# Altium PCB 高低音调节.PcbDoc
Units mil, origin at the board's own origin, x right, y up, seen from the top; angles counter-clockwise.
Board outline 11440 x 5375 mil, 2 copper layers (Top Layer, Bottom Layer); 43 components, 28 nets, 102 pads, 0 vias.
Unrouted connection lines stored in the file: 3.
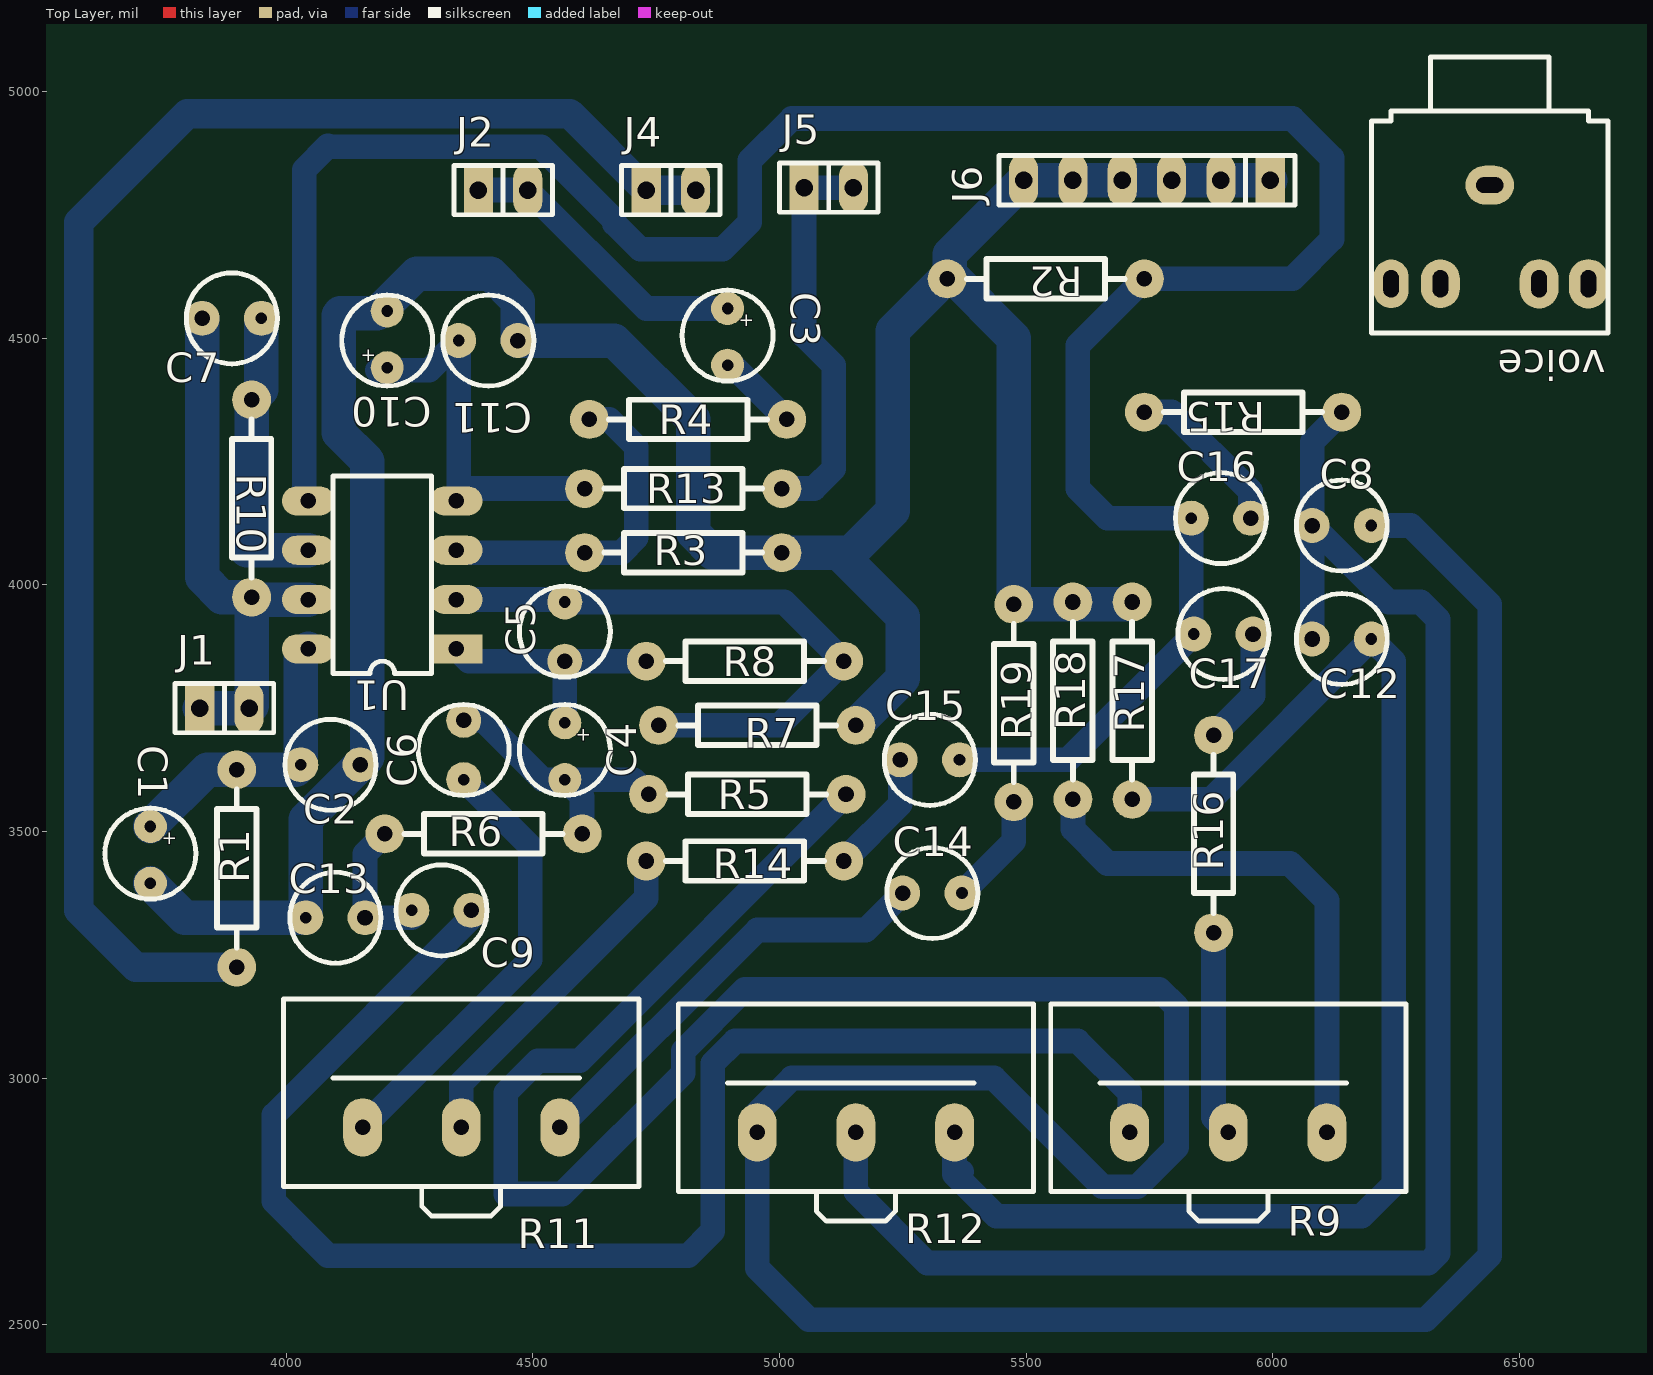
[diagram p0: Top Layer view]
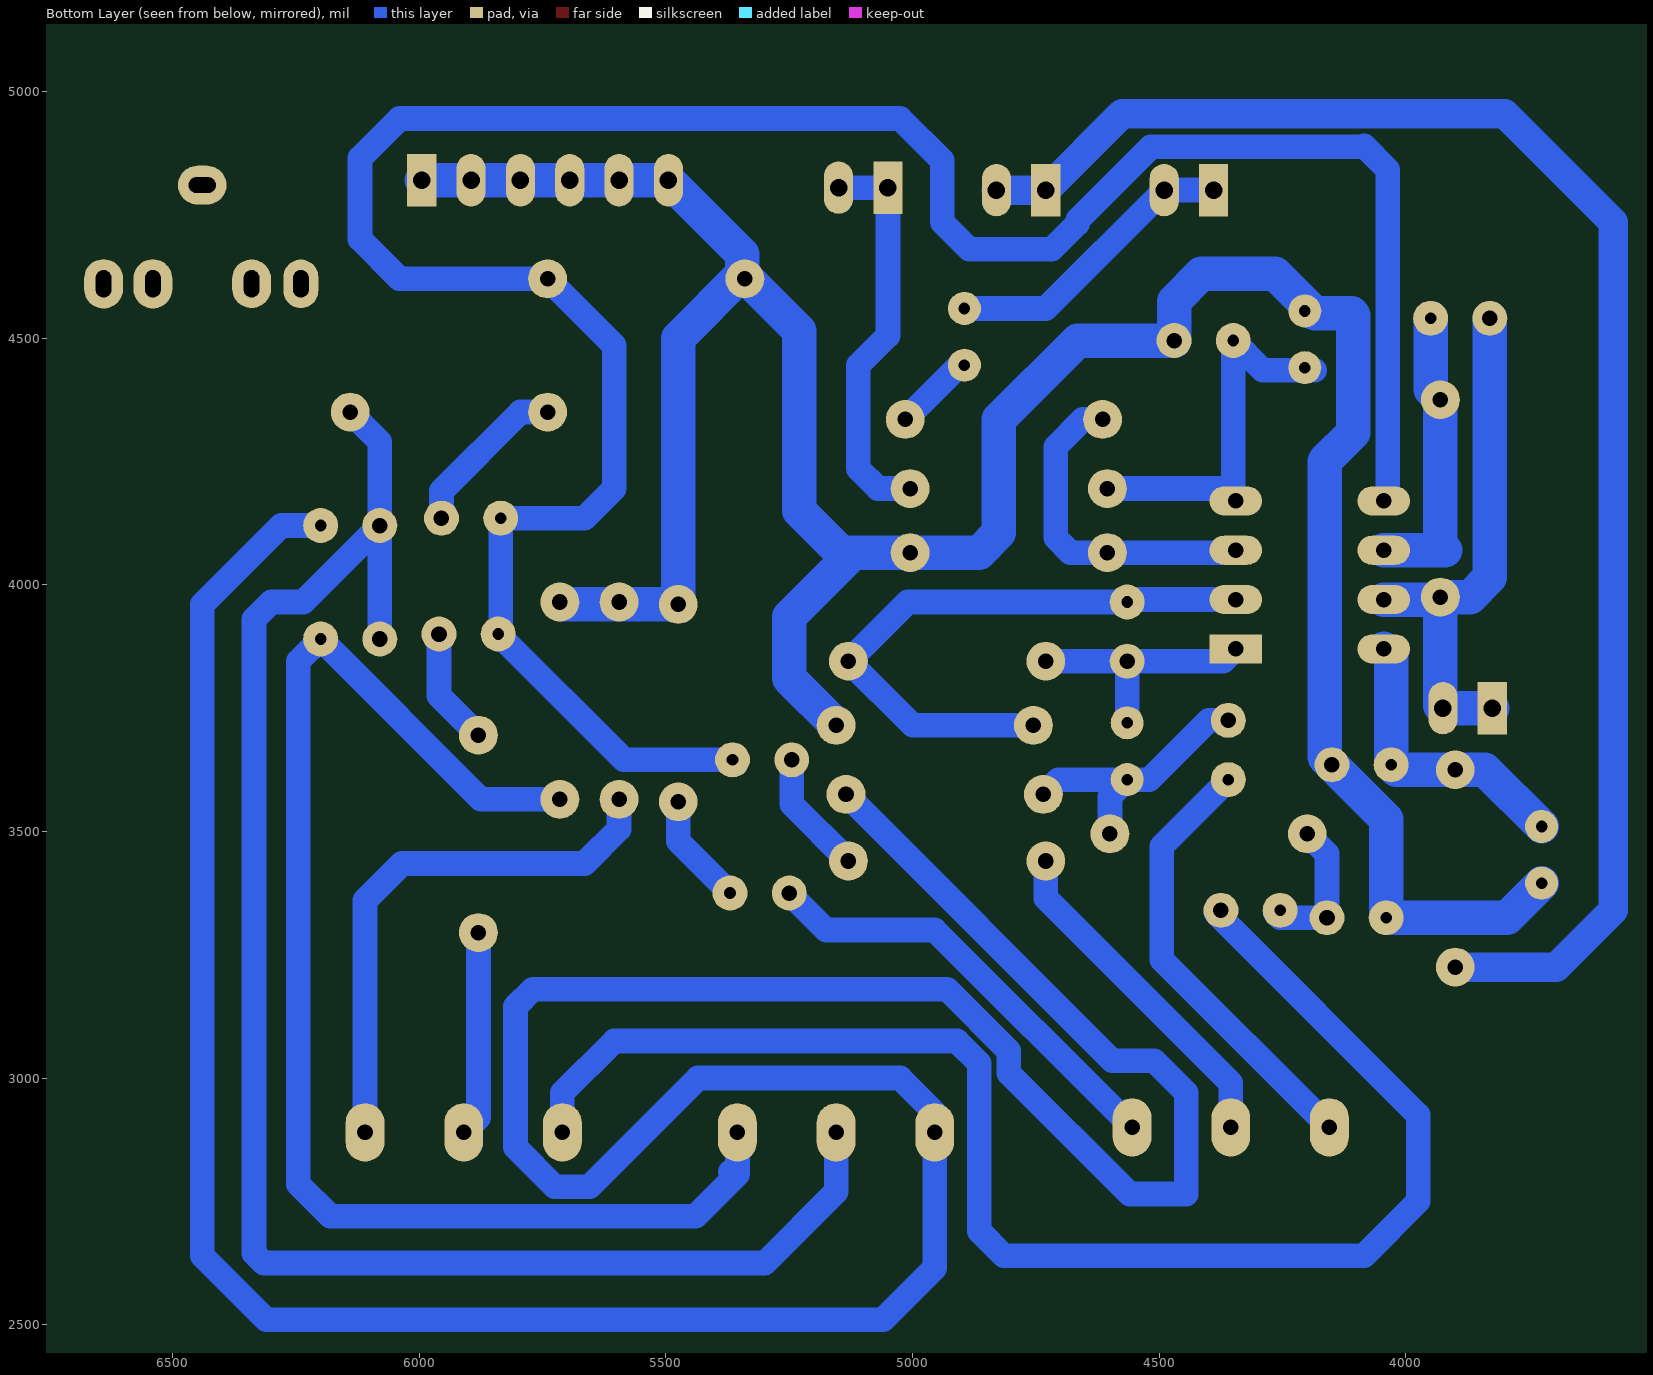
[diagram p1: Bottom Layer view, seen from below]

## Layer stack, top to bottom
Top Solder: solder mask 0.4, Solder Resist, Dk 3.5
Top Layer: signal copper 1.4
Dielectric1: dielectric 12.6, FR-4, Dk 4.8
Bottom Layer: signal copper 1.4
Bottom Solder: solder mask 0.4, Solder Resist, Dk 3.5

## Board outline
545,5375 11630,5375 11935,5070 11935,0 495,0 520,25 520,5360

## Design rules (kind name [scope] priority, off if disabled: settings)
Clearance [All] p1: gap=10
FabricationTestPointUsage TestPointUsage [All] p1: valid=0 allowmultiple=FALSE
FabricationTestpoint Testpoint [All] p1: side=3 testpointundercomponent=TRUE minsize=40 maxsize=100 preferedsize=60 minholesize=0 maxholesize=40 preferedholesize=32 testpointgrid=1 allowsidetop=TRUE allowsidebottom=TRUE usegrid=TRUE gridtolerance=0.01
PolygonConnect [All] p1: connectstyle=Relief reliefconductorwidth=10 reliefentries=4 polygonreliefangle="90 Angle" airgapwidth=10
RoutingLayers [All] p1: top layer_v5=FALSE bottom layer_v5=TRUE
RoutingVias [All] p1: holewidth=28 width=50 viastyle="Through Hole" minholewidth=28 minwidth=50 maxholewidth=28 maxwidth=50
SilkToSolderMaskClearance SilkscreenOverComponentPads [IsPad] p1: minsilkscreentomaskgap=10 clearancetoexposedcopper=TRUE
SolderMaskExpansion [All] p1: expansion=4
Width [All] p1: maxlimit=80 minlimit=50 preferedwidth=50
25 further rules are at their usual default settings.

## Components (designator, comment, footprint, x,y, rotation, side; value= is the part's Value field where it differs from the comment)
C1 "22UF" CAO1 3725,3465 r270 top
C2 "104" CAP2 4150,3635 r180 top
C3 "CAP3" CAO1 4895,4515 r270 top
C4 "22UF" CAO1 4565,3675 r270 top
C5 "10PF" CAP2 4565,3845 r90 top
C6 "223" CAP2 4360,3725 r270 top
C7 "10PF" CAP2 3830,4540 r0 top
C8 "683" CAP2 6080,4120 r0 top
C9 "333" CAP2 4375,3340 r180 top
C10 "22UF" CAO1 4205,4485 r90 top
C11 "104" CAP2 4470,4495 r180 top
C12 "683" CAP2 6080,3890 r0 top
C13 "333" CAP2 4160,3325 r180 top
C14 "223" CAP2 5250,3375 r0 top
C15 "224" CAP2 5245,3645 r0 top
C16 "224" CAP2 5955,4135 r180 top
C17 "224" CAP2 5960,3900 r180 top
J1 "CON2" sip-2 3825,3750 r0 top
J2 "CON2" sip-2 4390,4800 r0 top
J4 "CON2" sip-2 4730,4800 r0 top
J5 "CON2" sip-2 5050,4805 r0 top
J6 "CON6" SIP-6 5995,4820 r180 top
R1 "220" AXIAL0.4 3900,3625 r270 top
R2 "10K" AXIAL0.4 5740,4620 r180 top
R3 "15K" AXIAL0.4 4605,4065 r0 top
R4 "1K" AXIAL0.4 5015,4335 r180 top
R5 "1K" AXIAL0.4 5135,3575 r180 top
R6 "2K" AXIAL0.4 4200,3495 r0 top
R7 "1K" AXIAL0.4 5155,3715 r180 top
R8 "2K" AXIAL0.4 4730,3845 r0 top
R9 "10K" RVR-A 5710,2890 r0 top
R10 "10K" AXIAL0.4 3930,4375 r270 top
R11 "10K" RVR-A 4155,2900 r0 top
R12 "10K" RVR-A 4955,2890 r0 top
R13 "220" AXIAL0.4 4605,4195 r0 top
R14 "4.7K" AXIAL0.4 4730,3440 r0 top
R15 "4.7K" AXIAL0.4 5740,4350 r0 top
R16 "4.7K" AXIAL0.4 5880,3695 r270 top
R17 "1K" AXIAL0.4 5715,3965 r270 top
R18 "1K" AXIAL0.4 5595,3965 r270 top
R19 "2.7K" AXIAL0.4 5475,3960 r270 top
U1 "NE5532" DIP-8 4345,3870 r180 top
voice "PHONEJACK STEREO SW" SOUND1 6440,4810 r180 top

## Footprints (in the part's own frame and the unit in brackets; to place one, negate y for a bottom-side part, rotate by r counter-clockwise, add the part's x,y. Pads: shape width x height; smd on the part's side, far side on the other; paste and mask are expansions set on the pad)
AXIAL0.4 [mm]
  round 2 hole 0.8: 1(0,0) 2(10.16,0)
  silkscreen extent 1.02,-1.02 9.14,1.02
CAO1 [mm]
  round 1.7 hole 0.6: 1(-1.143,0) 2(1.778,0)
  silkscreen extent -2.09,-2.34 2.6,2.34
CAP2 [mm]
  round 1.8 hole 0.8: 1(0,0)
  round 1.8 hole 0.6: 2(3.048,0)
  silkscreen extent -0.82,-2.34 3.87,2.34
DIP-8 [mm]
  rect 2.7x1.5 hole 0.8: 1(0,0)
  oval 2.7x1.5 hole 0.8: 2(0,-2.54) 3(0,-5.08) 4(0,-7.62) 5(7.62,-7.62) 6(7.62,-5.08) 7(7.62,-2.54) 8(7.62,0)
  silkscreen extent 1.27,-8.89 6.35,1.27
RVR-A [mm]
  oval 2x3 hole 0.8: 1(0,0) 2(5.08,0) 3(10.16,0)
  silkscreen extent -4.06,-4.57 14.22,6.6
sip-2 [mm]
  rect 1.5x2.7 hole 0.9: 1(0,0)
  oval 1.5x2.7 hole 0.9: 2(2.54,0)
  silkscreen extent -1.27,-1.27 3.81,1.27
SIP-6 [mm]
  rect 1.5x2.7 hole 0.9: 1(0,0)
  oval 1.5x2.7 hole 0.9: 2(2.54,0) 3(5.08,0) 4(7.62,0) 5(10.16,0) 6(12.7,0)
  silkscreen extent -1.27,-1.27 13.97,1.27
SOUND1 [mm]
  oval 2x2.54 hole 0.8 slot 1.4 at 90 deg: 1(-5.08,5.08) 2(-2.54,5.08)
  oval 2x2.5 hole 0.8 slot 1.4 at 90 deg: 3(2.54,5.08)
  oval 1.8x2.5 hole 0.8 slot 1.4 at 90 deg: 4(5.08,5.08)
  oval 2.5x2 hole 0.8 slot 1.4 at 0 deg: 5(0,0)
  silkscreen extent -6.1,-6.6 6.1,7.62

## Part data
C1 C4 C10: library part CAP3
C2 C5 C6 C7 C8 C9 C11 C12 C13 C14 C15 C16 C17: library part CAP1
J1 J2 J4 J5 J6: "Connector"
R1 R2 R3 R4 R5 R6 R7 R8 R10 R13 R14 R15 R16 R17 R18 R19: library part RES
R9 R11 R12: library part RPOT-1, "Potentiometer"

## Nets (pads, with @x,y where several pads share a name; then routed paths per layer and width w, separated by ;. In a path a pad name is that pad's centre, name@x,y a point inside that pad or via, vN(x,y) a via of type N, cw(c..) or ccw(c..) an arc to the next point about the centre after c; other vN are vias at no path point)
+20V: J4.1 J4.2 R1.2 | length 3168
  Bottom Layer w60: R1.2 3695,3225 3580,3340 3580,4735 3800,4955 4575,4955 J4.1 J4.2
-20V: J5.1 J5.2 R13.2 | length 816.4
  Bottom Layer w50: R13.2 5070,4195 5110,4235 5110,4445 5050,4505 J5.1 J5.2
GND: C1.2 C2.1 C10.2 C11.1 C13.2 J6.1 J6.2 J6.3 J6.4 J6.5 J6.6 R2.2 R3.2 R7.1 R17.1 R18.1 R19.1 voice.5 | length 5939.3
  Bottom Layer w70: C1.2 3795,3325 C13.2 4040,3525 C2.1 4165,3650 4165,4250 4106.54,4308.46 4106.54,4546.54 4110,4550 4185,4550 4265,4630 4415,4630 4470,4575 C11.1 4665,4495 4825,4335 4825,4105 4865,4065 R3.2 5120,4065 ; R7.1 5250,3810 5250,3935 5120,4065 ; R17.1 5710,3960 R19.1 5475,4500 R2.2@5345,4630 ; J6.1 J6.2 J6.3 J6.4 J6.5 J6.6 5345,4670 R2.2@5345,4630 ; 5120,4065 5145,4065 5230,4150 5230,4515 R2.2@5345,4630
NetC1_1: C1.1 C2.2 R1.1 U1.8 | length 598
  Bottom Layer w70: C1.1 3840,3625 R1.1 4020,3625 C2.2 4030,3855 U1.8
NetC3_1: C3.1 J2.1 J2.2 voice.3 voice.4 | length 604.4
  Bottom Layer w50: J2.1 J2.2 4730,4560 C3.1
NetC3_2: C3.2 R4.1 | length 165.6
  Bottom Layer w50: C3.2 4905,4445 R4.1
NetC4_1: C4.1 C5.1 R8.1 U1.1 | length 520.4
  Bottom Layer w50: U1.1 4370,3845 C5.1 ; C4.1 C5.1 ; R8.1 C5.1
NetC4_2: C4.2 C6.1 R5.2 R6.2 | length 561.6
  Bottom Layer w50: C6.1 4400,3725 4520,3605 C4.2 ; R6.2 4600,3570 C4.2 ; R5.2 4705,3605 C4.2
NetC5_2: C5.2 R7.2 R8.2 U1.2 | length 1265.6
  Bottom Layer w50: U1.2 4560,3970 C5.2 5010,3965 R8.2 5000,3715 R7.2
NetC6_2: C6.2 R11.1 | length 901.8
  Bottom Layer w50: R11.1 4495,3240 4495,3470 C6.2
NetC7_1: C7.1 J1.1 J1.2 R10.2 U1.7 | length 1085.7
  Bottom Layer w70: J1.1 J1.2 3930,3755 R10.2 ; C7.1 3830,4015 3870,3975 R10.2 ; U1.7 3935,3970 R10.2
NetC7_2: C7.2 R10.1 U1.6 | length 607.4
  Bottom Layer w70: C7.2 3950,4395 R10.1 3930,4080 3920,4070 U1.6
NetC8_1: C8.1 C12.1 R12.2 R15.2 | length 3471.9
  Bottom Layer w50: R12.2 5155,2770 5300,2625 6315,2625 6335,2645 6335,3930 6300,3965 6235,3965 C8.1 ; C12.1 C8.1 ; R15.2 6080,4290 C8.1
NetC8_2: C8.2 R5.1 R12.1 | length 7530.1
  Bottom Layer w50: R5.1 4595,3035 4510,3035 4445,2970 4445,2765 4560,2765 4805,3010 4805,3054.85 4930.15,3180 5770,3180 5805,3145 5805,2860 5725,2780 5655,2780 5435,3000 5025,3000 4955,2930 R12.1 4955,2615 5060,2510 6310,2510 6440,2640 6440,3960 6280,4120 C8.2
NetC9_1: C9.1 R9.1 | length 3038.2
  Bottom Layer w50: C9.1@4385,3335 3975,2925 3975,2750 4085,2640 4815,2640 4865,2690 4865,3030 4910,3075 5605,3075 5710,2970 R9.1
NetC9_2: C9.2 C13.1 R6.1 | length 295.7
  Bottom Layer w50: R6.1 4160,3455 C13.1 4255,3325 C9.2@4265,3335
NetC10_1: C10.1 C11.2 R13.1 U1.4 | length 780.2
  Bottom Layer w50: C10.1@4185,4435 4290,4435 C11.2 U1.4@4350,4175 ; U1.4 U1.4@4350,4175 ; R13.1 4370,4195 U1.4@4350,4175
NetC12_2: C12.2 R12.3 R17.2 | length 2797.3
  Bottom Layer w50: R12.3 5355,2805 ; 5369.85,2810 5360,2810 5355,2805 ; R17.2 5875,3565 C12.2 6245,3845 6245,2785 6180,2720 5440,2720 5355,2805
NetC14_1: C14.1 R11.3 | length 891.8
  Bottom Layer w50: R11.3 4955,3300 5175,3300 C14.1
NetC14_2: C14.2 R19.2 | length 228.5
  Bottom Layer w50: C14.2 5475,3480 R19.2
NetC15_1: C15.1 R14.2 | length 252.6
  Bottom Layer w50: R14.2 5245,3555 C15.1
NetC15_2: C15.2 C16.2 C17.2 R2.1 U1.5 | length 5217.4
  Bottom Layer w50: U1.5 4036.54,4178.46 4036.54,4841.54 4085,4890 4086.85,4888.15 4516.73,4888.15 4665.47,4739.41 4665.47,4732.35 4717.83,4680 4885,4680 4940,4735 4940,4860 5025,4945 6040,4945 6120,4865 6120,4700 6040,4620 R2.1 5605,4485 5605,4195 5665,4135 C16.2 5835,3905 C17.2 5585,3645 C15.2
NetC16_1: C16.1 R15.1 | length 336.3
  Bottom Layer w50: R15.1 5795,4350 5955,4190 C16.1
NetC17_1: C17.1 R16.1 | length 238.1
  Bottom Layer w50: R16.1 5960,3775 C17.1
NetR3_1: R3.1 R4.2 U1.3 | length 682.3
  Bottom Layer w50: U1.3 4350,4065 R3.1 4680,4065 4710,4095 4710,4280 4655,4335 R4.2
NetR9_2: R9.2 R16.2 | length 417.4
  Bottom Layer w50: R16.2 5880,2920 R9.2
NetR9_3: R9.3 R18.2 | length 1105.1
  Bottom Layer w50: R18.2 5595,3505 5665,3435 6035,3435 6110,3360 R9.3
NetR11_2: R11.2 R14.1 | length 695.3
  Bottom Layer w50: R11.2 4355,2990 4730,3365 R14.1
pads on no net: voice.1 voice.2
copper on no net: | length 1.3
  Bottom Layer w50: 4605,4333.74 4605,4335

## Text inside footprints (layer, text, board x,y; h text height)
C1: Top Overlay "+" at 3751.57,3501.42 h27.56 r270
C3: Top Overlay "+" at 4921.57,4551.42 h27.56 r270
C4: Top Overlay "+" at 4591.57,3711.42 h27.56 r270
C10: Top Overlay "+" at 4178.43,4448.58 h27.56 r90